# EAGLE board diseño_placa_pcb (EAGLE 9.6.2)
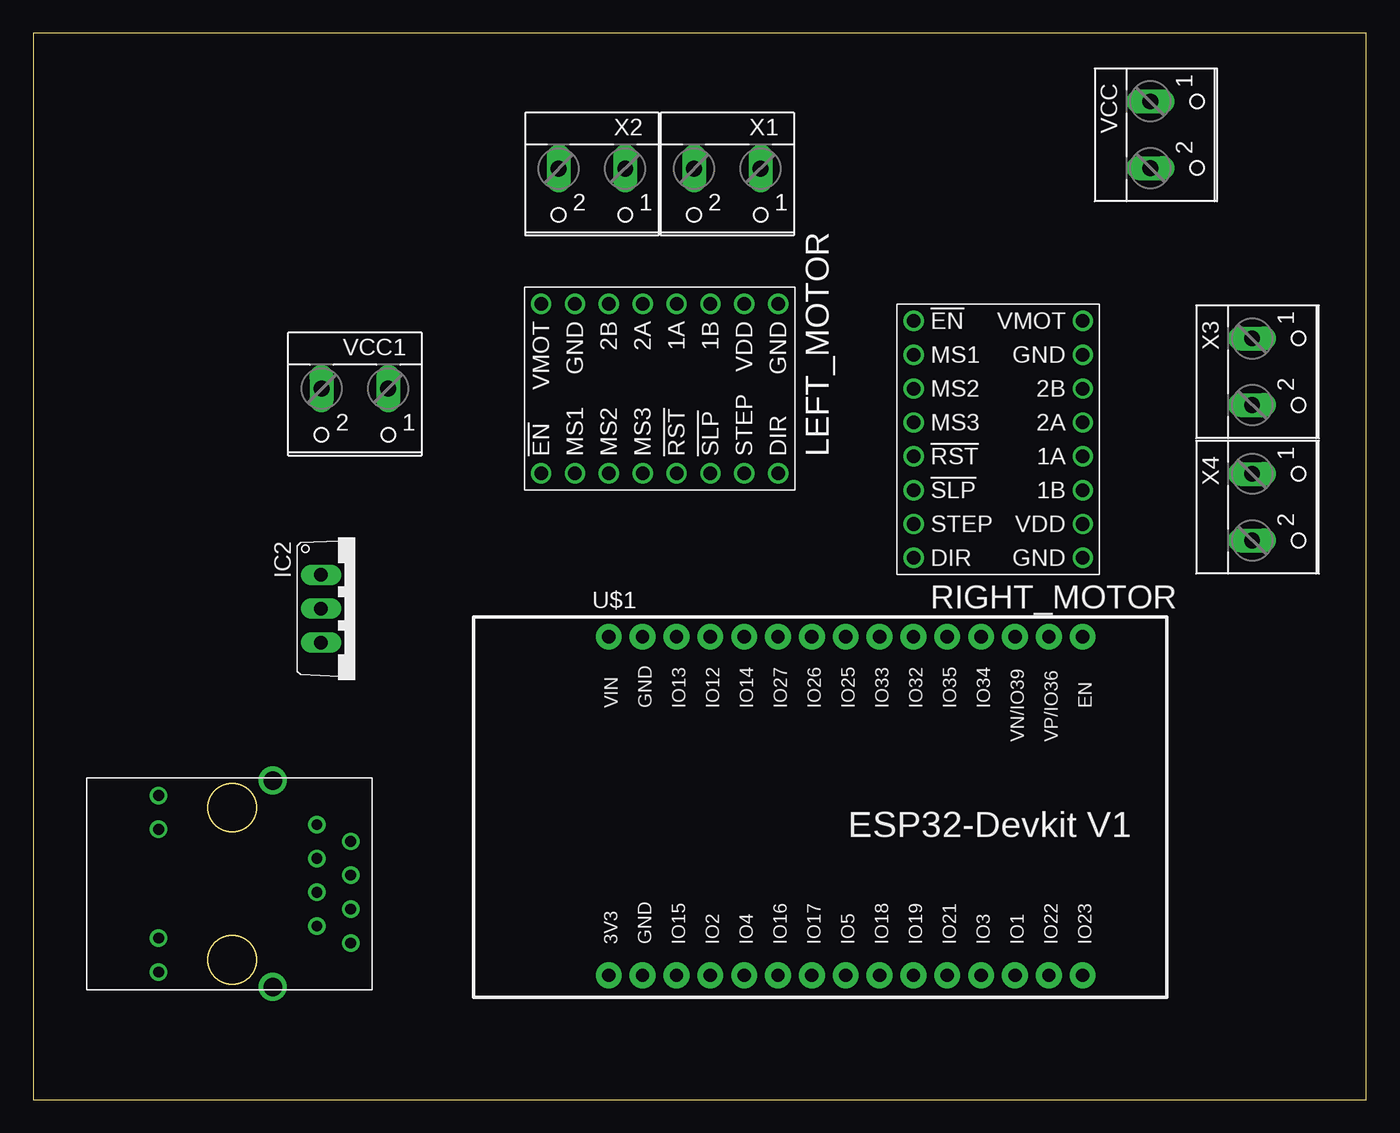
[diagram p0: board, top side]
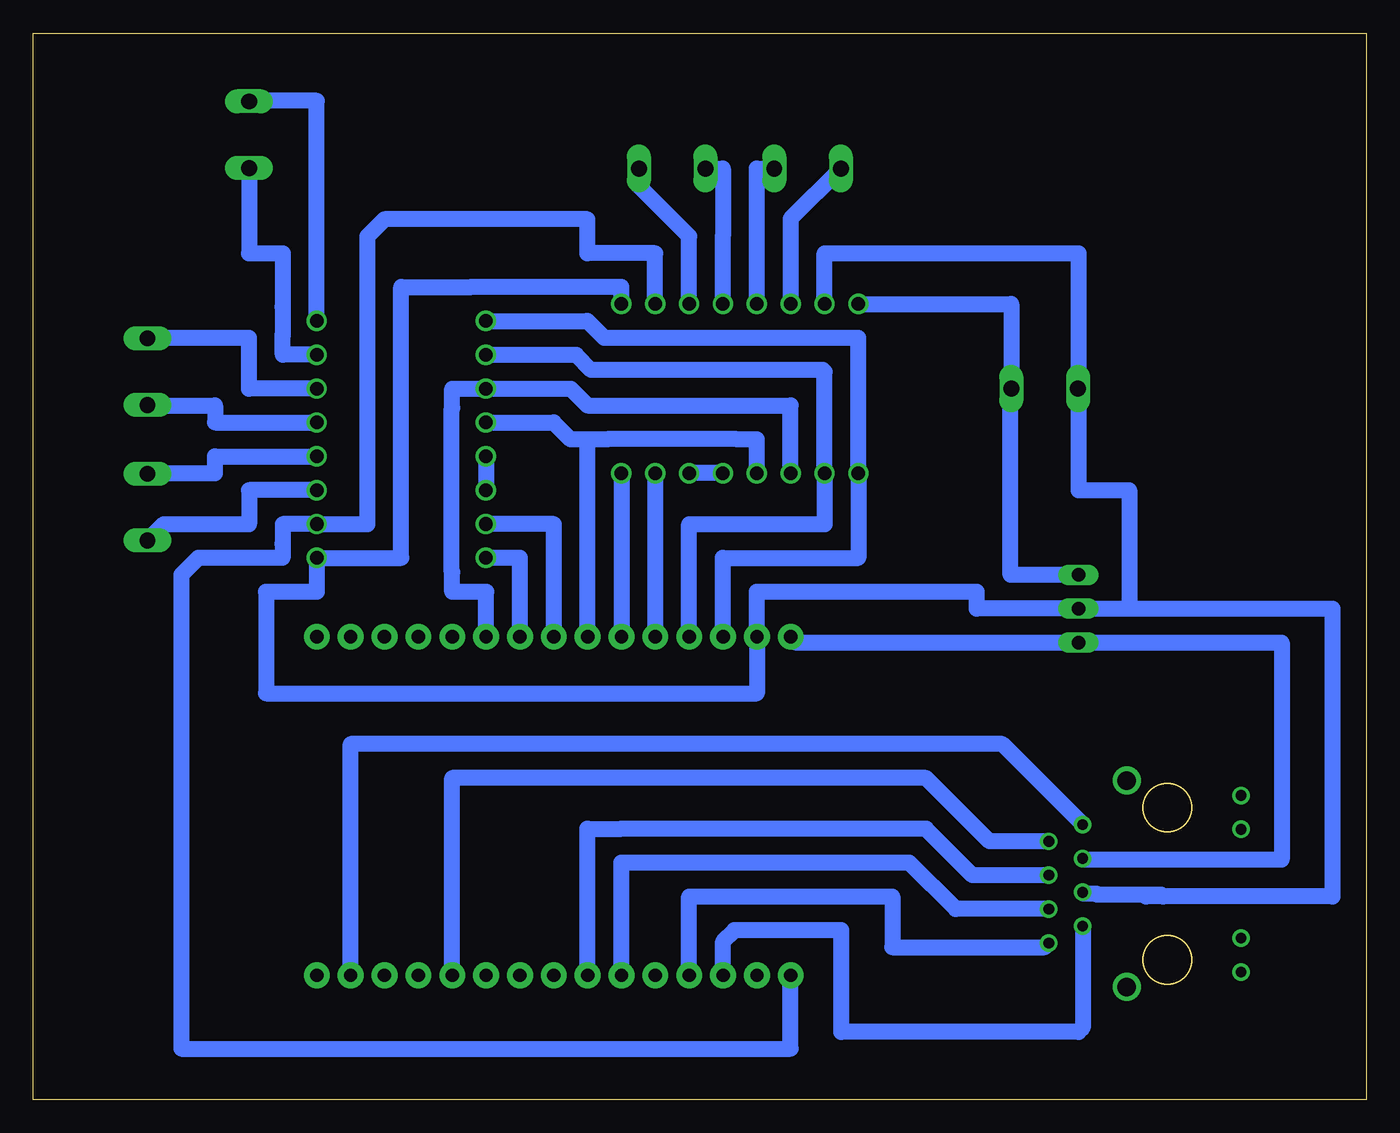
[diagram p1: board, bottom side, seen from below]

Size 100 x 80 mm. Coordinates in mm from the lower left corner, seen from the top.
Outline: 0,0 100,0 100,80 0,80 0,0
Copper layers (1*16): Top 0.035mm / dielectric 1.5mm / Bottom 0.035mm
Design rules "diseño_placa_pcb": minimum track width 1.2mm, minimum drill 0.35mm, track to track 1.2mm, track to pad 1.2mm, pad to pad 0.205mm, via to via 0.205mm, smd to smd 6mil, copper to edge 40mil, drill to drill 6mil, minimum pad ring 10mil, minimum via ring 8mil, stop-mask expansion 4mil, vias tented up to drill 0mil, thermal gap 10mil
Net classes: 0 default: clearance 0.205 mm

## Footprints (pad centres in the part's own frame; a part is rotated, then mirrored left to right if it is on the bottom)
TO220V = drill 1.016 long: 1 -2.54,-2.54; 2 0,-2.54; 3 2.54,-2.54
A4988 = drill 1.016: 1 -6.35,8.89; 2 -6.35,6.35; 3 -6.35,3.81; 4 -6.35,1.27; 5 -6.35,-1.27; 6 -6.35,-3.81; 7 -6.35,-6.35; 8 -6.35,-8.89; 9 6.35,-8.89; 10 6.35,-6.35; 11 6.35,-3.81; 12 6.35,-1.27; 13 6.35,1.27; 14 6.35,3.81; 15 6.35,6.35; 16 6.35,8.89
ESP32-DEVKITV1 = drill 1 pad 1.93: 3V3 -16.52,-12.27; D1 13.96,-12.27; D2 -8.9,-12.27; D3 11.42,-12.27; D4 -6.36,-12.27; D5 1.26,-12.27; D12 -8.9,13.135; D13 -11.44,13.135; D14 -6.36,13.135; D15 -11.44,-12.27; D16 -3.82,-12.27; D17 -1.28,-12.27; D18 3.8,-12.27; D19 6.34,-12.27; D21 8.88,-12.27; D22 16.5,-12.27; D23 19.04,-12.27; D25 1.26,13.135; D26 -1.28,13.135; D27 -3.82,13.135; D32 6.34,13.135; D33 3.8,13.135; D34 11.42,13.135; D35 8.88,13.135; D36 16.5,13.135; D39 13.96,13.135; EN 19.04,13.135; GND@1 -13.98,13.135; GND@2 -13.98,-12.27; VIN -16.52,13.135
RJ45 = drill 0.8: G+ 5.84,-6.305; G- 5.84,-3.765; GND -8.57,4.76; NC -6.03,3.5; P4 -8.57,-0.32; P5 -6.03,0.96; RD+ -6.03,-1.58; RD- -8.57,2.22; TD+ -6.03,-4.12; TD- -8.57,-2.86; Y+ 5.84,6.945; Y- 5.84,4.405 | drill 1.4: SHIELD1 -2.73,-7.425; SHIELD2 -2.73,8.065
W237-102 = drill 1.194 long: 1 -2.5,-1.27; 2 2.5,-1.27

## Placement (x,y rotation side)
IC2  7805TV  [TO220V]  24.13,36.83 270 top
LEFT_MOTOR  2128-A4988  [A4988]  46.99,53.34 90 top
RIGHT_MOTOR  2128-A4988  [A4988]  72.39,49.53 0 top
U$1  ESP32DEVKITV1  [ESP32-DEVKITV1]  59.69,21.59 0 top
U$2  HR911105A  [RJ45]  15.24,16.51 180 top
VCC  [W237-102]  85.09,72.39 270 top
VCC1  [W237-102]  24.13,52.07 180 top
X1  [W237-102]  52.07,68.58 180 top
X2  [W237-102]  41.91,68.58 180 top
X3  [W237-102]  92.71,54.61 270 top
X4  [W237-102]  92.71,44.45 270 top

## Library data of the parts
IC2 = linear
LEFT_MOTOR RIGHT_MOTOR = pololu-stepper-driver
U$1 = ESP32-DEVKITV1
U$2 = HR911105A
VCC VCC1 X1-X4 = con-wago-500; MPN: 237-102; OC_FARNELL: unknown; OC_NEWARK: 70K9898

## Nets
1A_L: LEFT_MOTOR.12 X1.2
1A_R: RIGHT_MOTOR.12 X4.1
1B_L: LEFT_MOTOR.11 X1.1
1B_R: RIGHT_MOTOR.11 X4.2
2A_L: LEFT_MOTOR.13 X2.1
2A_R: RIGHT_MOTOR.13 X3.2
2B_L: LEFT_MOTOR.14 X2.2
2B_R: RIGHT_MOTOR.14 X3.1
3.3V: LEFT_MOTOR.10 RIGHT_MOTOR.10 U$1.3V3
5V: IC2.3 U$1.VIN U$2.RD+
DIR_L: LEFT_MOTOR.8 U$1.D27
DIR_R: RIGHT_MOTOR.8 U$1.D33
ENABLE: LEFT_MOTOR.1 RIGHT_MOTOR.1 U$1.D13
GND: IC2.2 LEFT_MOTOR.9 LEFT_MOTOR.15 RIGHT_MOTOR.9 U$1.GND@1 U$2.P5 VCC1.2
MS1: LEFT_MOTOR.2 RIGHT_MOTOR.2 U$1.D12
MS2: LEFT_MOTOR.3 RIGHT_MOTOR.3 U$1.D32
MS3: LEFT_MOTOR.4 RIGHT_MOTOR.4 U$1.D26
N$8: LEFT_MOTOR.5 LEFT_MOTOR.6
N$11: RIGHT_MOTOR.5 RIGHT_MOTOR.6
RDY1: U$1.D15 U$2.NC
RX: U$1.D16 U$2.RD-
S$1: RIGHT_MOTOR.15 VCC.2
SCL: U$1.D22 U$2.TD+
SDA: U$1.D21 U$2.TD-
STEP_L: LEFT_MOTOR.7 U$1.D14
STEP_R: RIGHT_MOTOR.7 U$1.D25
TX: U$1.D17 U$2.P4
VBB_EN: U$1.D2 U$2.GND
VCC: IC2.1 LEFT_MOTOR.16 VCC1.1
VCC_2: RIGHT_MOTOR.16 VCC.1

## Tracks (layer width: path | path; a pad name or v marks a point on that pad's centre or on a via)
1A_L
  Bottom 1.2: LEFT_MOTOR.12 48.26,63.5 48.26,64.77 48.26,69.85 X1.2
1A_R
  Bottom 1.2: RIGHT_MOTOR.12 86.36,48.26 86.36,46.99 91.4,46.99 X4.1
1B_L
  Bottom 1.2: X1.1 54.57,68.62 54.61,68.58 50.8,64.77 LEFT_MOTOR.11
1B_R
  Bottom 1.2: RIGHT_MOTOR.11 83.82,45.72 83.82,43.18 90.21,43.18 X4.2
2A_L
  Bottom 1.2: X2.1 45.72,69.85 LEFT_MOTOR.13
2A_R
  Bottom 1.2: RIGHT_MOTOR.13 86.36,50.8 86.36,52.07 91.4,52.07 X3.2
2B_L
  Bottom 1.2: X2.2 43.18,66.08 LEFT_MOTOR.14
2B_R
  Bottom 1.2: RIGHT_MOTOR.14 83.82,53.34 83.82,57.15 91.4,57.15 X3.1
3.3V
  Bottom 1.2: LEFT_MOTOR.10 53.34,63.5 58.42,63.5 58.42,66.04 73.66,66.04 74.93,64.77 74.93,43.18 RIGHT_MOTOR.10 81.28,43.18 81.28,41.72 81.3,41.7 81.3,40.64 87.63,40.64 88.9,39.37 88.9,3.81 43.18,3.81 U$1.3V3
5V
  Bottom 1.2: 19.77,34.27 19.75,34.29 | 19.75,34.29 6.35,34.29 6.35,18 21.18,18 U$2.RD+ | 19.75,34.29 IC2.3 42.73,34.29 U$1.VIN
DIR_L
  Bottom 1.2: LEFT_MOTOR.8 U$1.D27
DIR_R
  Bottom 1.2: RIGHT_MOTOR.8 63.5,40.64 63.49,40.63 U$1.D33
ENABLE
  Bottom 1.2: U$1.D13 48.25,40.63 48.26,40.64 38.1,40.64 LEFT_MOTOR.1 38.1,57.15 57.15,57.15 58.44,58.44 58.46,58.42 RIGHT_MOTOR.1
GND
  Bottom 1.2: U$1.GND@1 | U$1.GND@1 45.72,34.72 45.72,30.48 82.55,30.48 82.55,38.1 78.74,38.1 RIGHT_MOTOR.9 72.39,40.64 72.39,60.96 67.12,60.96 67.1,60.98 64.98,60.98 64.96,60.96 55.88,60.96 LEFT_MOTOR.9 | U$1.GND@1 45.71,38.09 45.72,38.1 29.21,38.1 29.21,36.83 IC2.2 17.78,36.83 | LEFT_MOTOR.15 40.64,63.5 21.59,63.5 21.59,53.38 | 21.59,53.38 VCC1.2 | 21.59,53.38 21.59,45.72 17.78,45.72 17.78,36.83 | 17.78,36.83 2.54,36.83 2.54,15.24 15.24,15.24 | 15.24,15.24 16.51,15.24 | 15.24,15.24 15.38,15.38 20.17,15.38 20.25,15.46 21.18,15.46 U$2.P5
MS1
  Bottom 1.2: RIGHT_MOTOR.2 59.27,55.88 58.14,54.75 40.78,54.75 40.64,54.61 LEFT_MOTOR.2 40.64,43.18 50.8,43.18 50.79,43.17 U$1.D12
MS2
  Bottom 1.2: LEFT_MOTOR.3 43.18,52.07 58.42,52.07 59.69,53.34 RIGHT_MOTOR.3 68.58,53.34 68.58,51.88 68.6,51.86 68.6,39.58 68.58,39.56 68.58,38.1 66.04,38.1 66.03,38.09 U$1.D32
MS3
  Bottom 1.2: LEFT_MOTOR.4 45.72,49.53 47.18,49.53 47.2,49.55 56.94,49.55 56.96,49.53 58.42,49.53 | 58.42,49.53 59.69,49.53 60.96,50.8 RIGHT_MOTOR.4 | U$1.D26 58.41,49.52 58.42,49.53
N$8
  Bottom 1.2: LEFT_MOTOR.5 LEFT_MOTOR.6
N$11
  Bottom 1.2: RIGHT_MOTOR.5 RIGHT_MOTOR.6
RDY1
  Bottom 1.2: U$1.D15 48.25,11.86 47.41,12.7 39.37,12.7 39.37,5.08 21.59,5.08 21.27,5.4 U$2.NC
RX
  Bottom 1.2: 53.34,17.78 53.33,17.77 | 53.33,17.77 53.32,17.78 34.29,17.78 30.8,14.29 U$2.RD- | 53.33,17.77 55.87,17.77 | 55.87,17.77 55.88,17.78 | U$1.D16 55.87,17.77
S$1
  Bottom 1.2: VCC.2 83.82,63.5 81.28,63.5 81.28,59.5 81.3,59.48 81.3,57.36 81.28,57.34 81.28,55.88 RIGHT_MOTOR.15
SCL
  Bottom 1.2: U$1.D22 76.19,26.67 27.31,26.67 U$2.TD+
SDA
  Bottom 1.2: U$1.D21 68.57,24.13 33.02,24.13 28.26,19.37 U$2.TD-
STEP_L
  Bottom 1.2: LEFT_MOTOR.7 U$1.D14
STEP_R
  Bottom 1.2: RIGHT_MOTOR.7 60.96,43.18 60.95,43.17 U$1.D25
TX
  Bottom 1.2: U$2.P4 29.53,16.83 33.02,20.32 54.61,20.32 55.87,20.32 58.42,20.32 58.41,20.31 U$1.D17
VBB_EN
  Bottom 1.2: U$1.D2 50.79,15.23 | 50.79,15.23 50.8,15.24 | 50.79,15.23 50.78,15.24 35.56,15.24 35.56,11.43 24.13,11.43 U$2.GND
VCC
  Bottom 1.2: IC2.1 26.69,39.37 26.69,53.28 VCC1.1 26.63,59.69 LEFT_MOTOR.16
VCC_2
  Bottom 1.2: VCC.1 83.78,74.93 78.74,74.93 RIGHT_MOTOR.16